# EAGLE board HPLEDShield-v24 (EAGLE 5.10)
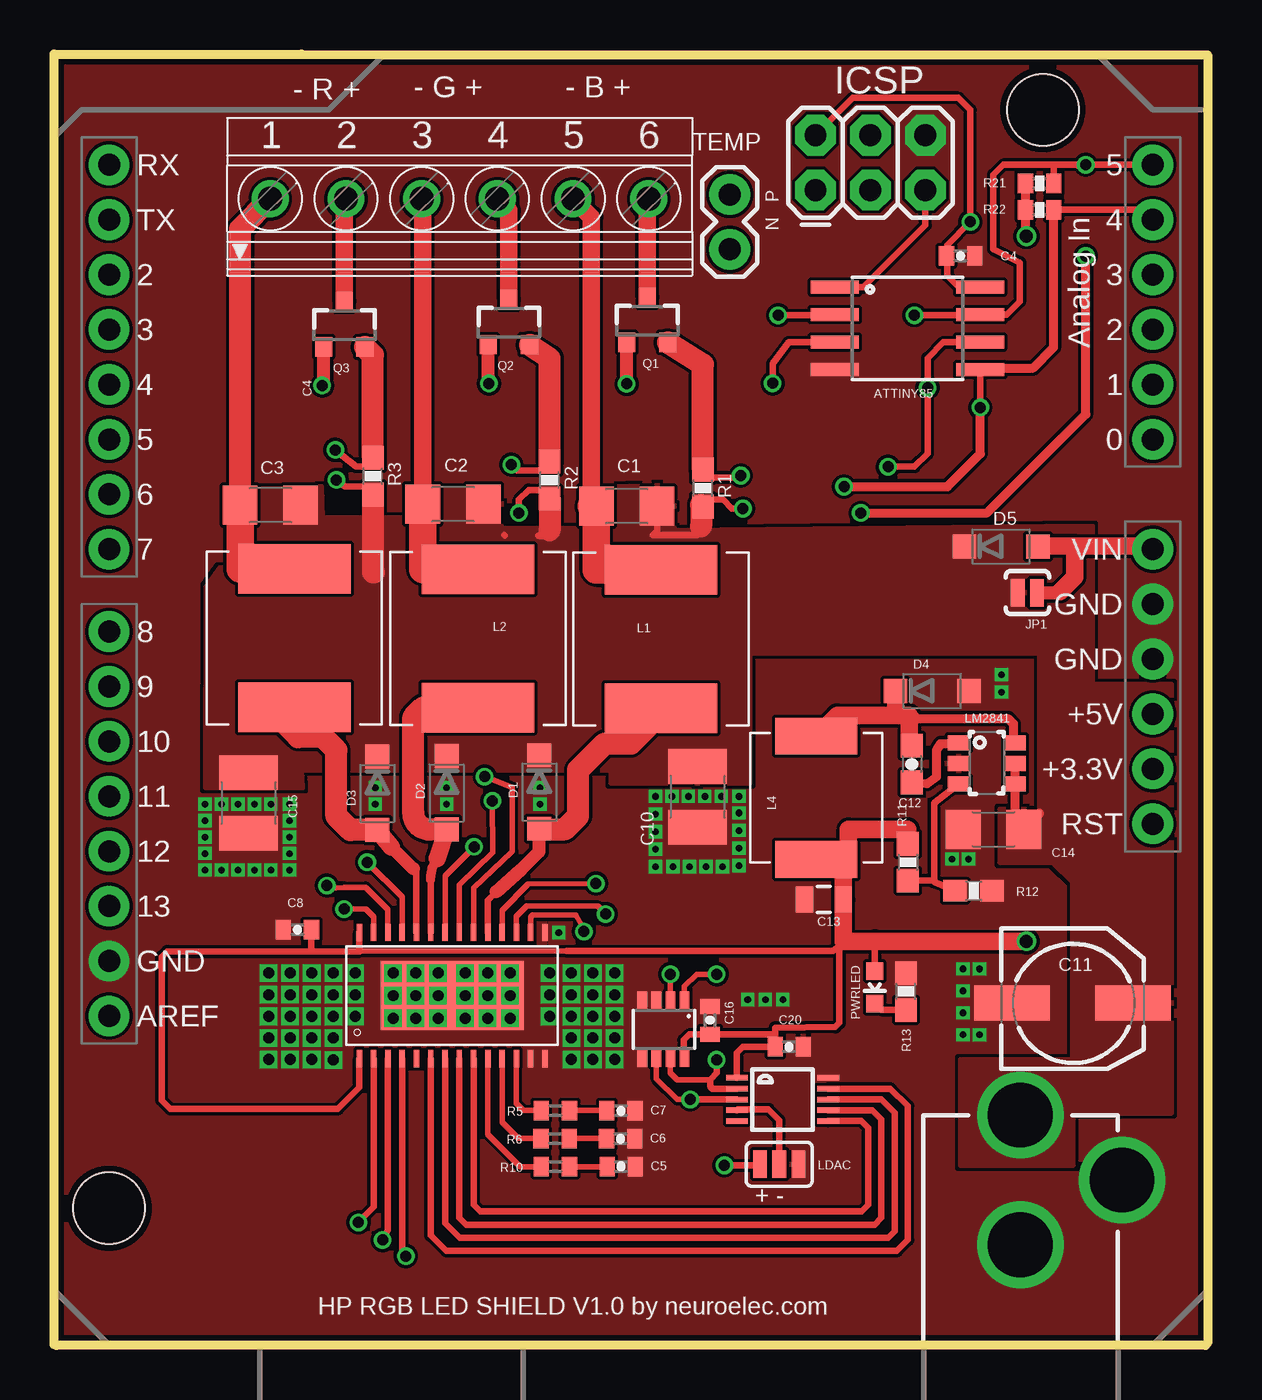
[diagram p0: board, top side]
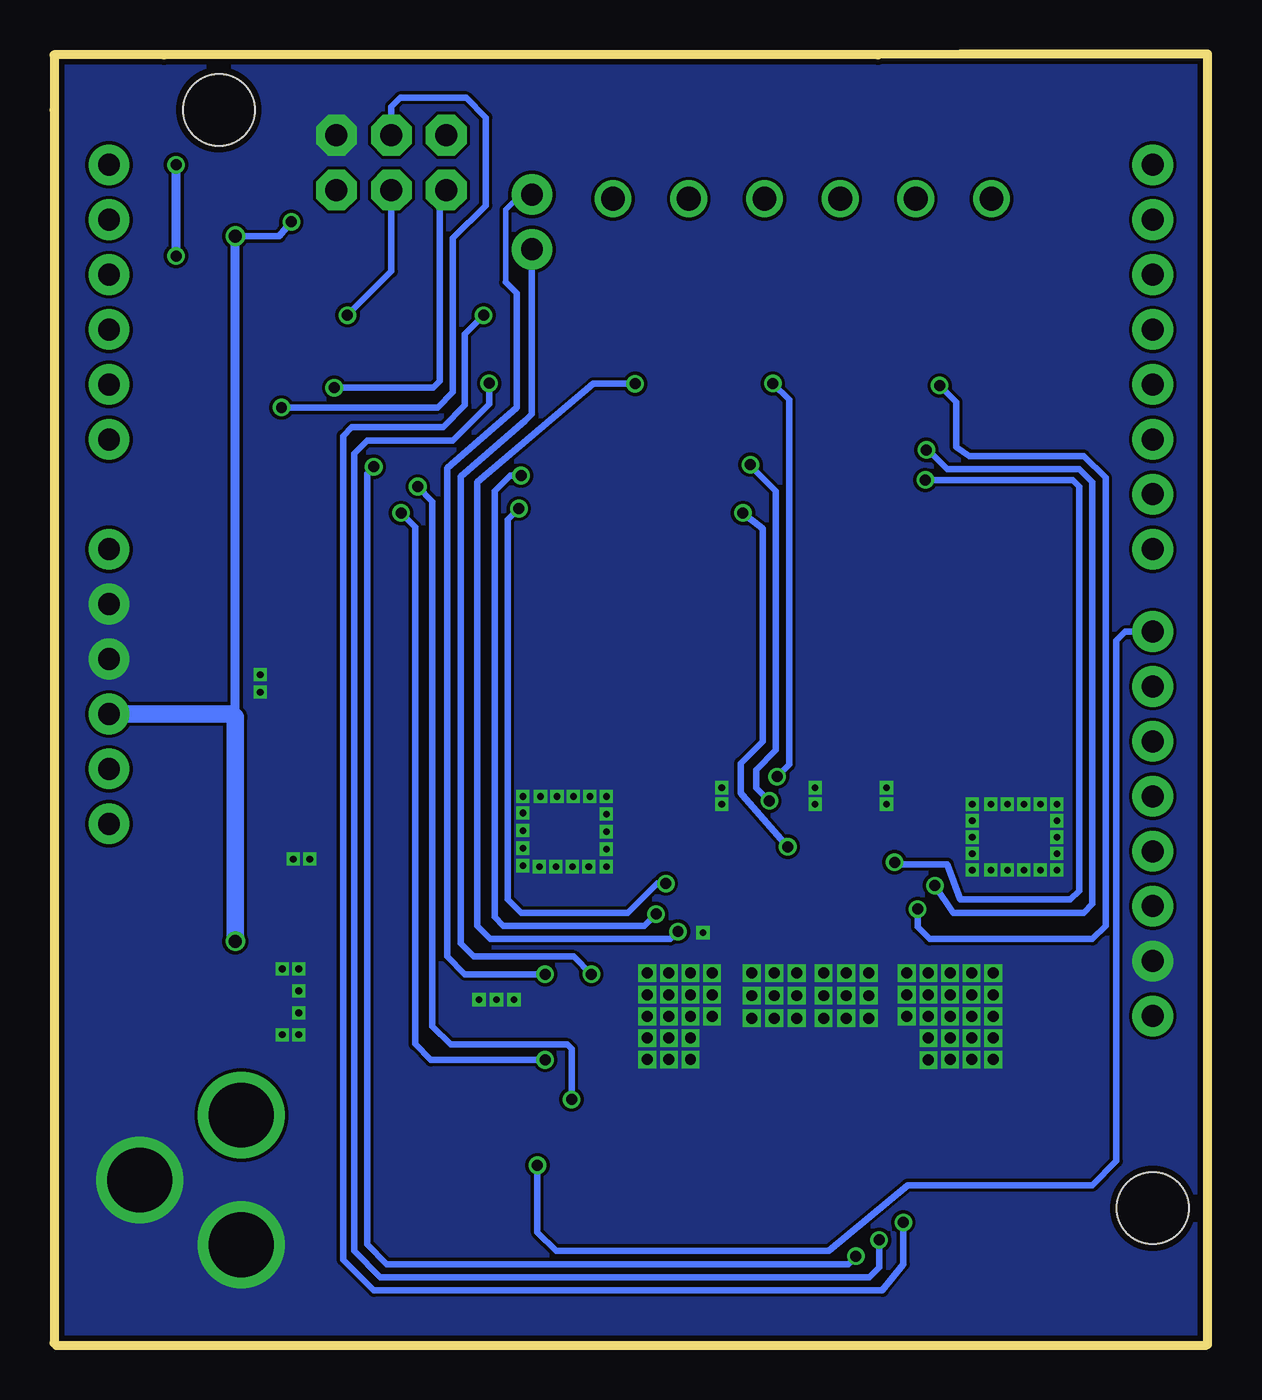
[diagram p1: board, bottom side, seen from below]

Size 53.34 x 59.73 mm. Coordinates in mm from the lower left corner, seen from the top.
Outline: 53.34,0.1 53.34,57.15 53.34,59.69 48.26,59.69 15.24,59.69 11.43,59.73 0,59.73 0,55.88 0,0.06
Outline: 53.24,0 0.1,0
Copper layers (1*16): Top 0.035mm / dielectric 1.5mm / Bottom 0.035mm
Design rules "Fusion_eagle_rule_v1.1 *": minimum track width 6mil, minimum drill 12mil, track to track 6mil, track to pad 6mil, pad to pad 6mil, via to via 6mil, smd to smd 0mil, copper to edge 10mil, drill to drill 10mil, minimum pad ring 10mil, minimum via ring 6mil, stop-mask expansion 2mil, vias tented up to drill 100mil, thermal gap 0mil

## Footprints (pad centres in the part's own frame; a part is rotated, then mirrored left to right if it is on the bottom)
1206 = smd 1.6 x 1.8: 1 -1.4,0; 2 1.4,0
0402-CAP = smd 0.7 x 0.9: 1 -0.65,0; 2 0.65,0
C1210 = smd 1.6 x 2.7: 1 -1.4,0; 2 1.4,0
NICHICON_63 = smd 3.5 x 1.6: + 2.8,-0.2; - -2.8,-0.2
0603-CAP = smd 1.1 x 1: 1 -0.85,0; 2 0.85,0
0805 = smd 0.8 x 1.2: 1 -0.9,0; 2 0.9,0
SOD123 = smd 1.1 x 1.1: 1 -1.7,0; 2 1.7,0
2X3 = drill 1.016 pad 1.88 octagon: 1 0,0; 2 0,2.54; 3 2.54,0; 4 2.54,2.54; 5 5.08,0; 6 5.08,2.54
POWER_JACK_PTH = drill 2.997 round: GND 0,7.7; GNDBREAK 4.7,10.7; PWR 0,13.7
SJ_2S-NO = smd 0.635 x 1.27: 1 -0.45,0; 2 0.45,0
LQH88P = smd 2.3 x 5.2: P$1 -3.21,0; P$2 3.19,0
ELL6UH = smd 1.7 x 3.8: P$1 -2.86,0; P$2 2.84,0
SJ_3 = smd 0.635 x 1.27: 1 -0.889,0; 2 0,0; 3 0.889,0
LED-0603 = smd 0.8 x 0.8: A 0,-0.75; C 0,0.75
SSOP28_LED = smd 0.8 x 0.25: 1 -2.921,4.298; 2 -2.921,3.637; 3 -2.921,2.977; 4 -2.921,2.317; 5 -2.921,1.656; 6 -2.921,0.996; 7 -2.921,0.335; 8 -2.927,-0.325; 9 -2.921,-0.985; 10 -2.921,-1.646; 11 -2.921,-2.306; 12 -2.921,-2.967; 13 -2.921,-3.627; 14 -2.921,-4.287; 15 2.921,-4.287; 16 2.921,-3.627; 17 2.921,-2.967; 18 2.921,-2.306; 19 2.921,-1.646; 20 2.921,-0.985; 21 2.927,-0.325; 22 2.921,0.335; 23 2.921,0.996; 24 2.921,1.656; 25 2.921,2.317; 26 2.921,2.977; 27 2.921,3.637; 28 2.921,4.298 | smd 3.2 x 6.6: 29 0,0.005
SOT-23 = smd 0.8 x 0.9: 1 -0.95,-1; 2 0.95,-1; 3 0,1.1
0603-RES = smd 1.1 x 1: 1 -0.85,0; 2 0.85,0
R0402 = smd 0.7 x 0.9: 1 -0.65,0; 2 0.65,0
0402-RES = smd 0.7 x 0.9: 1 -0.65,0; 2 0.65,0
1X02 = drill 1.016 pad 1.88 round: 1 0,0; 2 2.54,0
DUEMILANOVE_SHIELD = drill 1.016 pad 1.88 round: 3.3V 50.8,26.67; 5V 50.8,29.21; A0 50.8,41.91; A1 50.8,44.45; A2 50.8,46.99; A3 50.8,49.53; A4 50.8,52.07; A5 50.8,54.61; AREF 2.54,15.24; D2 2.54,49.53; D3 2.54,46.99; D4 2.54,44.45; D5 2.54,41.91; D6 2.54,39.37; D7 2.54,36.83; D8 2.54,33.02; D9 2.54,30.48; D10 2.54,27.94; D11 2.54,25.4; D12 2.54,22.86; D13 2.54,20.32; GND@0 50.8,31.75; GND@1 50.8,34.29; GND@2 2.54,17.78; RES 50.8,24.13; RX 2.54,54.61; TX 2.54,52.07; VIN 50.8,36.83 | hole 3.302: 45.72,57.15; 2.54,6.35
MSOP10 = smd 1 x 0.25: 1 -2.113,1; 2 -2.113,0.5; 3 -2.113,0; 4 -2.113,-0.5; 5 -2.113,-1; 6 2.113,-1; 7 2.113,-0.5; 8 2.113,0; 9 2.113,0.5; 10 2.113,1
SOT23-8 = smd 0.45 x 0.8: 1 -0.95,-1.55; 2 -0.3,-1.55; 3 0.35,-1.55; 4 1,-1.55; 5 1,1.15; 6 0.35,1.15; 7 -0.3,1.15; 8 -0.95,1.15
SO08-EIAJ = smd 0.61 x 2.21: 1 -1.905,-3.378; 2 -0.635,-3.378; 3 0.635,-3.378; 4 1.905,-3.378; 5 1.905,3.353; 6 0.635,3.353; 7 -0.635,3.353; 8 -1.905,3.353
TSOT-6 = smd 0.69 x 1: 1 -0.95,-1.3; 2 0,-1.3; 3 0.95,-1.3; 4 0.95,1.3; 5 0,1.3; 6 -0.95,1.3
1751280 = drill 1.1 pad 1.7 round: 1 -8.75,-0.1; 2 -5.25,-0.1; 3 -1.75,-0.1; 4 1.75,-0.1; 5 5.25,-0.1; 6 8.75,-0.1

## Placement (x,y rotation side)
C1  1uF  [1206]  26.48,38.82 180 top
C2  1uF  [1206]  18.45,38.91 180 top
C3  1uF  [1206]  10,38.87 180 top
C4  0.1uF 6.3V  [0402-CAP]  41.91,50.39 0 top
C5  1000PF  [0402-CAP]  26.22,8.28 180 top
C6  1000PF  [0402-CAP]  26.19,9.56 180 top
C7  1000PF  [0402-CAP]  26.21,10.86 180 top
C8  1uF 6.3V  [0402-CAP]  11.25,19.23 180 top
C10  50V 1uF  [C1210]  29.75,25.38 270 top
C11  4.7uF 63V  [NICHICON_63]  47.09,16.05 0 top
C12  0.15uF 50V  [0603-CAP]  39.66,26.89 270 top
C13  10uF 10V  [0805]  35.59,20.63 180 top
C14  1uF 50V  [1206]  43.44,23.88 0 top
C15  50V 1uF  [C1210]  8.99,25.1 270 top
C16  0.1uF 6.3V  [0402-CAP]  30.33,15.04 270 top
C20  0.1uF 6.3V  [0402-CAP]  33.99,13.82 180 top
D1  60V 1A  [SOD123]  22.44,25.6 270 top
D2  60V 1A  [SOD123]  18.15,25.56 270 top
D3  60V 1A  [SOD123]  14.95,25.54 270 top
D4  DIODE-SCHOTTKY_ 60V 1A  [SOD123]  40.61,30.28 0 top
D5  60V 1A  [SOD123]  43.79,36.96 0 top
ICSP  AVR_SPI_PRG_6PTH  [2X3]  35.21,53.44 0 top
J1  POWER_JACKPTH  [POWER_JACK_PTH]  44.68,-3.05 0 top
JP1  PWM3  [SJ_2S-NO]  45,34.82 180 top
L1  47uH 1.2A  [LQH88P]  28.06,32.68 90 top
L2  47uH 1.2A  [LQH88P]  19.6,32.71 90 top
L3  47uH 1.2A  [LQH88P]  11.11,32.73 90 top
L4  100uH 0.7A  [ELL6UH]  35.24,25.32 270 top
LDAC  + -  [SJ_3]  33.53,8.38 0 top
LED1  PWRLED  [LED-0603]  37.95,16.56 180 top
LT3496  LT3496D  [SSOP28_LED]  18.41,16.19 90 top
Q1  SI2303  [SOT-23]  27.43,47.39 0 top
Q2  SI2303  [SOT-23]  21.03,47.29 0 top
Q3  SI2303  [SOT-23]  13.42,47.18 0 top
R1  0.14  [0603-RES]  30,39.66 90 top
R2  0.14  [0603-RES]  22.91,40.03 90 top
R3  0.14  [0603-RES]  14.74,40.21 90 top
R5  0  [R0402]  23.18,10.87 180 top
R6  0  [R0402]  23.16,9.57 180 top
R10  0  [R0402]  23.18,8.27 180 top
R11  5.62K  [0603-RES]  39.47,22.35 270 top
R12  1.02K  [0603-RES]  42.52,21.03 180 top
R13  270  [0603-RES]  39.39,16.37 90 top
R21  1.8K  [0402-RES]  45.57,53.75 180 top
R22  1.8K  [0402-RES]  45.57,52.53 180 top
TEMP  N P  [1X02]  31.24,50.7 90 top
U1  ARDUINO_SHIELD  [DUEMILANOVE_SHIELD]  0,0 0 top
U$1  MCP4728  [MSOP10]  33.68,11.38 0 top
U$2  TMP421  [SOT23-8]  28.2,14.43 180 top
U$10  ATTINY85  [SO08-EIAJ]  39.47,47.04 270 top
U$11  LM2841  [TSOT-6]  43.13,26.92 270 top
X1  LED1+  [1751280]  18.75,53.14 0 top

## Library data of the parts
C1-C8 C11-C14 C16 C20 D1-D5 ICSP J1 JP1 L1-L4 LDAC LED1 R1-R3 R11-R13 R21 R22 TEMP U1 U$10 U$11 = SparkFun
C10 C15 = rcl
LT3496 Q1-Q3 U$1 U$2 = mylib
R5 R6 R10 = resistor
X1 = con-phoenix-350

## Nets
5V: C4.1 C8.1 C13.1 C16.2 C20.2 ICSP.2 L4.P$2 LED1.A LT3496.1 LT3496.28 R11.1 R21.2 R22.2 U1.5V U$1.1 U$2.8 U$10.8
GND: C4.2 C5.1 C6.1 C7.1 C8.2 C10.2 C11.- C13.2 C14.1 C15.2 C16.1 C20.1 D4.2 ICSP.6 J1.GND J1.GNDBREAK LDAC.3 LT3496.13 LT3496.14 LT3496.15 LT3496.29 R12.1 R13.2 U1.GND@0 U1.GND@1 U1.GND@2 U$1.10 U$2.3 U$2.4 U$2.5 U$10.4 U$11.2
LDAC: LDAC.2 U$1.4
MOSI/SDA: ICSP.4 R22.1 U1.A4 U$1.3 U$2.6 U$10.5
N$3: LT3496.12 R5.2
N$4: LT3496.11 R6.2
N$5: LT3496.10 R10.2
N$6: C7.2 R5.1
N$7: LDAC.1 U1.D8
N$8: C6.2 R6.1
N$9: C5.2 R10.1
N$10: LT3496.8 U$1.7
N$11: TEMP.2 U$2.1
N$12: TEMP.1 U$2.2
N$14: C12.1 D4.1 L4.P$1 U$11.6
N$15: LT3496.7 U$1.8
N$16: LT3496.21 Q2.2 R2.2
N$17: LT3496.9 U$1.6
N$18: LT3496.26 Q3.2 R3.2
N$19: LT3496.27 Q3.1
N$20: LT3496.6 U$1.9
N$21: D3.2 L3.P$1 LT3496.24
N$22: C1.2 L1.P$2 X1.5
N$23: LED1.C R13.1
N$25: C12.2 U$11.1
N$32: R11.2 R12.2 U$11.3
N$34: D2.2 L2.P$1 LT3496.23
N$36: Q3.3 X1.2
N$38: D1.2 L1.P$1 LT3496.19
N$39: LT3496.20 Q2.1
N$40: C3.2 L3.P$2 X1.1
N$42: LT3496.17 Q1.2 R1.2
N$46: LT3496.16 Q1.1
N$58: C2.2 L2.P$2 X1.3
N$63: Q2.3 X1.4
N$69: Q1.3 X1.6
PVIN: C1.1 C2.1 C3.1 C10.1 C11.+ C14.2 C15.1 D1.1 D2.1 D3.1 D5.1 J1.PWR JP1.2 LT3496.18 LT3496.22 LT3496.25 R1.1 R2.1 R3.1 U$11.4 U$11.5
PWM1: ICSP.1 LT3496.4 U$10.6
PWM2: LT3496.3 U$10.3
PWM3: LT3496.2 U$10.2
RESET: ICSP.5 U$10.1
SCK: ICSP.3 R21.1 U1.A5 U$1.2 U$2.7 U$10.7
VIN: D5.2 JP1.1 U1.VIN

## Tracks (layer width: path | path; a pad name or v marks a point on that pad's centre or on a via)
5V  (via drill 0.51, 0.6)
  Top 0.203: U$10.8 42.67,49.02
  Top 0.254: 23.7,18.24 14.13,18.24 14.13,18.26 14.11,18.26
  Top 0.305: v44.96,51.31 44.92,51.35 | 14.11,18.26 LT3496.28 | 14.13,18.24 14.13,18.23 11.89,18.23 | 11.89,18.23 5.23,18.23 4.98,17.98 4.98,11.34 5.38,10.94 13.13,10.94 14.11,11.93 LT3496.1 | C8.1 11.89,18.23 | 33.34,14.43 33.34,14.69 36.12,14.73 36.31,14.92 36.31,18.51 | 33.34,14.43 C20.2 31.85,13.82 31.57,13.53 U$1.1 | 33.34,14.43 33.3,14.39 C16.2 29.38,14.39 29.11,14.12 29.11,13.31 U$2.8 | 37.95,18.69 LED1.A | ICSP.2 36.93,57.71 41.81,57.71 42.37,57.15 v42.37,51.97 41.3,50.9 41.3,50.35 | 42.75,48.87 41.91,48.87 41.3,49.48 41.3,50.35 | 41.3,50.35 C4.1 | 23.7,18.24 36.04,18.24 36.31,18.51 | 36.31,18.51 36.49,18.69
  Top 0.406: R21.2 R22.2 44.92,51.35 | 42.75,48.87 U$10.8
  Top 0.813: v44.96,18.69 37.95,18.69 36.49,18.69 C13.1 36.49,22.48 L4.P$2 36.73,22.48 36.73,23.88 39.47,23.88 R11.1
  Bottom 0.305: v44.96,51.31 42.93,51.31 v42.37,51.97
  Bottom 0.406: 44.96,29.06 v44.96,51.31
  Bottom 0.813: v44.96,18.69 44.96,29.06 45.11,29.21 U1.5V
GND  (via drill 0.3, 0.51)
  other vias: 15.67,15.14 15.67,17.22 15.67,16.18 17.76,15.14 17.76,17.22 17.76,16.18 16.72,15.14 16.72,17.22 16.72,16.18 19,15.14 19,17.22 19,16.18 21.08,15.14 21.08,17.22 21.08,16.18 20.04,15.14 20.04,17.22 20.04,16.18 23.92,17.22 24.92,17.22 25.92,17.22 23.92,16.22 24.92,16.22 25.92,16.22 23.92,15.22 24.92,15.22 25.92,15.22 23.92,14.22 24.92,14.22 25.92,14.22 22.92,17.22 22.92,16.22 22.92,15.22 13.92,17.22 13.92,16.22 13.92,15.22 12.92,17.22 12.92,16.22 11.92,17.22 11.92,16.22 10.92,17.22 10.92,16.22 9.92,17.22 9.92,16.22 23.92,13.22 24.92,13.22 25.92,13.22 12.92,15.22 11.92,15.22 10.92,15.22 9.92,15.22 12.92,14.22 11.92,14.22 10.92,14.22 9.92,14.22 11.92,13.22 10.92,13.22 9.92,13.22 12.91,13.2 6.98,24.27 6.98,23.51 6.98,22.75 10.89,24.27 10.89,23.51 10.89,22.75 6.98,21.99 10.89,21.99 7.74,21.99 8.5,21.99 9.26,21.99 10.03,21.99 10.89,25.04 6.98,25.04 7.74,25.04 8.5,25.04 9.26,25.04 10.03,25.04 27.81,25.39 28.57,25.39 29.33,25.39 30.09,25.39 30.85,25.39 31.67,25.39 30.9,22.14 30.14,22.14 29.38,22.14 28.62,22.14 31.67,24.63 14.85,25.8 14.85,25.04 18.15,25.8 18.15,25.04 22.47,25.8 22.47,25.04 42.79,17.42 42.03,17.42 42.03,16.4 42.03,15.38 42.03,14.37 42.79,14.37 41.52,22.5 42.28,22.5 31.67,23.82 31.67,23 31.67,22.19 27.81,24.58 27.81,23.77 27.81,22.95 27.81,22.14 23.34,19.09 32.07,15.99 32.89,15.99 33.7,15.99 43.81,31.03 43.81,30.22
  pour Top (rank 2): -1.98,61.37 -3.81,61.37 -3.81,-2.03 56.85,-2.03 56.85,61.37 -1.67,61.37
  pour Bottom: 56.24,62.59 -3.2,62.59 -3.2,-4.47 56.24,-4.47
LDAC
  Top 0.305: U$1.4 31.61,10.92 33.02,10.92 33.53,10.41 LDAC.2
MOSI/SDA  (via drill 0.51)
  Top 0.254: v29.41,11.38 28.81,11.38 27.85,12.34 U$2.6
  Top 0.305: v42.83,43.38 U$10.5 | R22.1 50.34,52.53 U1.A4 | v29.41,11.38 U$1.3
  Top 0.406: v36.53,39.73 41.3,39.73 42.83,41.25 v42.83,43.38 | U$10.5 42.9,45.21 45.27,45.21 46.22,46.17 R22.1
  Bottom 0.305: v29.41,11.38 29.41,13.73 29.61,13.92 35,13.92 35.84,14.76 35.84,39.04 v36.53,39.73 | ICSP.4 37.75,57.3 37.34,57.71 34.29,57.71 33.38,56.79 33.38,52.73 34.9,51.21 34.9,44.09 35.61,43.38 v42.83,43.38
N$3
  Top 0.254: LT3496.12 21.38,11.19 21.7,10.87 R5.2
N$4
  Top 0.254: 22.41,9.55 22.43,9.57 | LT3496.11 20.72,10.32 21.47,9.57 R6.2
  Top 0.305: R6.2 22.49,9.55 22.41,9.55
N$5
  Top 0.254: LT3496.10 20.06,9.77 21.55,8.27 R10.2
N$6
  Top 0.254: R5.1 25.51,10.87 C7.2
N$7  (via drill 0.51)
  Top 0.305: LDAC.1 32.59,8.33 v30.99,8.33
  Bottom 0.305: U1.D8 3.81,33.02 4.22,32.61 4.22,8.53 5.34,7.42 13.87,7.42 17.53,4.37 30.13,4.37 30.99,5.23 v30.99,8.33
N$8
  Top 0.254: R6.1 25.52,9.57 C6.2
N$9
  Top 0.254: R10.1 25.52,8.27 C5.2
N$10
  Top 0.305: LT3496.8 18.74,5.9 19.05,5.59 37.95,5.59 38.25,5.89 38.25,10.46 37.84,10.88 U$1.7
N$11  (via drill 0.51)
  Top 0.254: U$2.1 29.15,16.6 29.72,17.17 v30.63,17.17
  Bottom 0.254: 32.46,49.17 32.46,52.53 31.75,53.24 TEMP.2
  Bottom 0.305: 32.46,49.17 31.95,48.67 31.95,43.38 35.16,40.59 35.16,17.98 34.34,17.17 v30.63,17.17
N$12  (via drill 0.51)
  Top 0.254: U$2.2 v28.5,17.17
  Bottom 0.305: TEMP.1 31.24,43.08 31.55,42.77 34.55,40.18 34.55,18.59 33.94,17.98 29.31,17.98 v28.5,17.17
N$14
  Top 0.406: 39.62,28.99 44.11,28.99 44.35,28.75 44.35,27.95 U$11.6 | C12.1 39.59,27.74 39.54,27.79
  Top 0.813: 39.54,29.15 39.62,28.99 | 39.54,29.15 39.54,27.79 | 39.19,29.15 39.54,29.15 | D4.1 38.91,29.43 39.19,29.15 | L4.P$1 36.21,29.15 39.19,29.15
N$15
  Top 0.305: LT3496.7 18.08,5.65 18.75,4.98 38.56,4.98 38.86,5.28 38.86,10.77 38.25,11.38 U$1.8
N$16  (via drill 0.51, 0.51 pad 0.25)
  Top 0.254: LT3496.21 18.74,21.31 20.29,22.8 v20.27,25.19
  Top 0.305: v21.14,40.74 21.42,40.46 22.58,40.46 22.61,40.55 R2.2
  Top 0.813: 22,46.27 Q2.2
  Top 1.016: 22,46.27 22.91,45.66 R2.2
  Bottom 0.305: v20.27,25.19 20.88,25.8 20.88,26.62 19.97,27.53 19.97,39.52 21.14,40.7 v21.14,40.74
N$17
  Top 0.305: LT3496.9 19.4,6.5 19.7,6.2 37.34,6.2 37.65,6.5 37.65,10.06 37.32,10.38 U$1.6
N$18  (via drill 0.51, 0.51 pad 0.25)
  Top 0.254: LT3496.26 15.43,20.16 14.41,21.19 13.41,21.19 13.02,21.17 v12.61,21.27
  Top 0.305: R3.2 14.32,40.64 13.97,40.64 v13.01,41.42
  Top 1.016: Q3.2 14.74,45.81 R3.2
  Bottom 0.305: v12.61,21.27 11.76,20.02 5.74,20.02 5.34,20.42 5.34,39.93 5.95,40.54 12.04,40.54 12.93,41.42 v13.01,41.42
N$19  (via drill 0.51, 0.51 pad 0.25)
  Top 0.254: LT3496.27 14.77,19.82 14.41,20.19 v13.41,20.19
  Top 0.305: 12.47,44.31 12.47,44.32 v12.4,44.4
  Top 0.61: 12.47,44.31 Q3.1
  Bottom 0.305: v13.41,20.19 13.41,19.35 12.85,18.8 5.34,18.8 4.73,19.41 4.73,40.13 5.74,41.15 11.03,41.15 11.63,41.55 11.63,43.64 v12.4,44.4
N$20
  Top 0.305: LT3496.6 17.41,5.09 18.14,4.37 38.97,4.37 39.47,4.88 39.47,11.07 38.67,11.88 U$1.9
N$21
  Top 0.305: LT3496.24 16.75,21.91 16.61,22.05
  Top 0.61: 16.61,22.05 15.6,23.06
  Top 0.813: 15.6,23.06 D3.2
  Top 1.016: D3.2 13.7,23.84 13.06,24.49 13.06,27.53 12.45,28.14 11.28,28.14 10.21,29.21
  Top 1.27: 9.6,29.67 10.06,29.21 10.21,29.21 10.8,29.21 L3.P$1
N$22
  Top 0.813: 24.84,38.82 24.84,52.19 X1.5
  Top 1.27: L1.P$2 25.08,35.87 C1.2 24.84,38.82
N$23
  Top 0.305: LED1.C 38.24,15.52 R13.1
N$25
  Top 0.406: U$11.1 41.8,27.84 41,27.84 40.8,27.53 40.8,26.31 40.37,25.99 C12.2
N$32
  Top 0.305: U$11.3 40.69,25.09 40.69,21.5 | R12.2 40.69,21.44 40.69,21.5 | 40.69,21.5 R11.2
N$34
  Top 0.305: LT3496.23 17.41,21.55
  Top 0.406: 17.41,21.55 arc-34 17.72,22.53
  Top 0.813: 17.72,22.53 D2.2
  Top 1.016: L2.P$1 17.05,29.5 16.61,29.06 16.61,24.62 arc90 17.37,23.86 D2.2
N$36
  Top 0.813: X1.2 13.42,52.96 Q3.3
N$38
  Top 0.305: LT3496.19 20.06,20.59 20.44,20.98
  Top 0.61: 20.44,20.98 21.61,22.03 22.43,22.84 D1.2
  Top 1.016: D1.2 22.46,23.88 23.62,23.88 24.23,24.49 24.23,26.62 25.45,27.84 26.67,27.84 28.06,29.23 L1.P$1
N$39  (via drill 0.51, 0.51 pad 0.25)
  Top 0.254: LT3496.20 19.4,21.17 21.19,22.86 21.19,25.81 v19.91,26.31
  Top 0.61: Q2.1 20.08,44.77 v20.11,44.49
  Bottom 0.254: v20.11,44.49 20.11,44.44
  Bottom 0.305: v19.91,26.31 19.36,26.86 19.36,43.74 v20.11,44.49
N$40
  Top 1.016: X1.1 8.6,51.64 C3.2
  Top 1.27: L3.P$2 8.6,35.92 C3.2
N$42  (via drill 0.51, 0.51 pad 0.25)
  Top 0.254: LT3496.17 21.38,19.85 21.85,20.32 25.14,20.32 v25.5,19.95
  Top 0.305: R1.2 30.38,40.13 31.65,40.13 v31.75,40.23
  Top 1.016: Q1.2 30.01,45.37 R1.2
  Bottom 0.305: v25.5,19.95 26.05,19.41 32.56,19.41 32.97,19.81 32.97,39.52 32.26,40.23 v31.75,40.23
N$46  (via drill 0.51, 0.51 pad 0.25)
  Top 0.254: LT3496.16 22.04,19.81 22.14,19.91 24.13,19.91 24.49,19.26 v24.49,19.15
  Top 0.61: Q1.1 26.48,45.08 v26.47,44.48
  Bottom 0.305: v26.47,44.48 28.42,44.48 33.78,39.93 33.78,19.41 33.17,18.8 24.85,18.8 v24.49,19.15
N$58
  Top 0.813: X1.3 17.05,52.99 C2.2
  Top 1.27: L2.P$2 17.05,35.9 C2.2
N$63
  Top 0.813: Q2.3 21.03,52.51 X1.4
N$69
  Top 0.813: Q1.3 27.43,53.04 X1.6
PVIN  (via drill 0.51)
  Top 0.203: LT3496.25 16.11,19.1
  Top 0.254: LT3496.18 20.72,20.11 21.92,21.34 v25.05,21.37 | LT3496.22 18.08,21.72 v19.42,23.07 | v14.48,22.35 16.09,20.74 LT3496.25
  Top 0.305: U$11.5 U$11.4 | R2.1 22.91,39.22 22.51,39.56 21.94,39.56 21.49,39.12 v21.49,38.51 | v13.06,40.03 13.46,39.73 14.48,39.73 14.48,39.01 R3.1 | C2.1 19.97,38.8 | 20.84,37.46 20.81,37.49 | 22.91,37.69 arc-90 22.38,37.46 | v31.85,38.71 31.35,38.71 30.94,39.12 30.31,39.12 R1.1 | C1.1 27.88,37.68 27.69,37.49 29.75,37.49 29.92,37.9
  Top 0.406: C14.2 45.57,24.61 44.43,24.61 U$11.5
  Top 1.016: R3.1 14.74,35.81 arc90 14.79,35.76 | 22.91,39.22 22.91,37.69 | R1.1 29.92,38.89 29.92,37.9
  Bottom 0.305: v19.42,23.07 21.49,25.44 21.59,25.54 21.59,26.92 20.58,27.94 20.58,37.8 v21.49,38.51 | v14.48,22.35 14.38,22.25 12.04,22.25 11.43,20.62 6.35,20.62 5.95,21.03 5.95,39.73 6.25,40.03 v13.06,40.03 | v31.85,38.71 32.36,38.2 32.36,20.62 31.75,20.02 26.81,20.02 25.46,21.37 v25.05,21.37
  pour Top: 48.01,37.9 28.66,37.7 28.66,39.81 26.06,39.71 26.06,37.8 20.65,37.8 20.68,39.61 16,39.61 16.07,38.27 12.41,38.27 12.35,39.73 10.75,39.61 9.61,39.62 8.47,37.08 7.03,35.07 7.02,25.82 11.48,25.78 11.43,26.62 25.76,26.62 25.76,26.01 32.16,26.01 32.16,32.02 45.57,32.02 45.57,24.79 43.74,24.79 43.74,22.35 46.18,22.35 47.09,21.44 47.09,13.21 41.91,13.21 41.91,8.33 47.09,8.33 47.09,10.77 51.67,10.77 51.67,30.58 48.01,30.58
PWM1  (via drill 0.51)
  Top 0.305: 42.22,46.43 42.24,46.41 U$10.6 41.12,46.41 40.39,45.67 v40.39,44.3 40.39,41.25 39.78,40.64 v38.56,40.64 | LT3496.4 16.09,4.3 v16.26,4.13
  Bottom 0.305: v16.26,4.13 16.26,4.11 16.61,3.76 37.95,3.76 38.86,4.67 38.86,40.34 v38.56,40.64 | v40.39,44.3 35.82,44.3 35.51,44.6 35.51,53.14 ICSP.1
PWM2  (via drill 0.51)
  Top 0.305: U$10.3 33.96,46.41 33.23,45.41 v33.23,44.5 | LT3496.3 15.43,5.32 v15.19,4.88
  Bottom 0.305: v15.19,4.88 15.19,3.61 15.65,3.15 38.25,3.15 39.47,4.37 39.47,41.25 38.86,41.86 34.9,41.86 33.23,43.54 v33.23,44.5
PWM3  (via drill 0.51)
  Top 0.305: 14.79,13.27 LT3496.2 14.79,13.25 14.79,6.4 v14.07,5.69 | U$10.2 36.07,47.65 v33.48,47.65
  Bottom 0.305: v14.07,5.69 14.07,3.76 15.04,2.54 38.56,2.54 39.98,3.96 39.98,42.06 39.58,42.47 35.36,42.47 34.34,43.48 34.34,46.79 v33.48,47.65
RESET
  Top 0.305: ICSP.5 40.29,51.82 37.42,48.95 U$10.1
SCK  (via drill 0.51)
  Top 0.254: U$2.7 arc-90 U$2.7 28.5,12.6 28.81,12.29 30.33,12.29
  Top 0.305: 47.4,54.61 46.22,54.61 | v47.7,54.61 U1.A5 | 46.22,54.61 R21.1 | U$1.2 30.44,11.88 30.33,11.99 30.33,12.29 30.63,12.6 v30.63,13.21 | v39.78,47.65 42.8,47.65 U$10.7 44.05,47.68 44.66,48.28 44.66,50.09 43.44,50.7 43.44,54.15 43.89,54.61 46.22,54.61
  Top 0.406: v37.3,38.51 43.13,38.51 47.7,43.08 v47.7,50.39 | v47.7,54.61 47.4,54.61
  Bottom 0.305: v39.78,47.65 37.75,49.68 ICSP.3 | v30.63,13.21 35.92,13.21 36.65,13.94 36.65,37.85 v37.3,38.51
  Bottom 0.406: v47.7,50.39 v47.7,54.61
VIN
  Top 0.406: 50.65,36.98 U1.VIN
  Top 0.61: 46.53,34.87 46.53,34.82 JP1.1
  Top 0.813: 47.19,36.98 45.75,36.98 arc90 D5.2 | 47.19,36.98 50.65,36.98 | 46.53,34.87 47.19,35.54 47.19,36.98

## Text on the board
tPlace: - R + | - G + | - B + | HP RGB LED SHIELD V1.0 by neuroelec.com
_tNames: C4